# Altium PCB Non-Isolated Gate Driver and Supply.PcbDoc
Units mil, origin at the board's own origin, x right, y up, seen from the top; angles counter-clockwise.
Board outline 3300 x 1325 mil, 2 copper layers (Top Layer, Bottom Layer); 27 components, 32 nets, 90 pads, 12 vias.
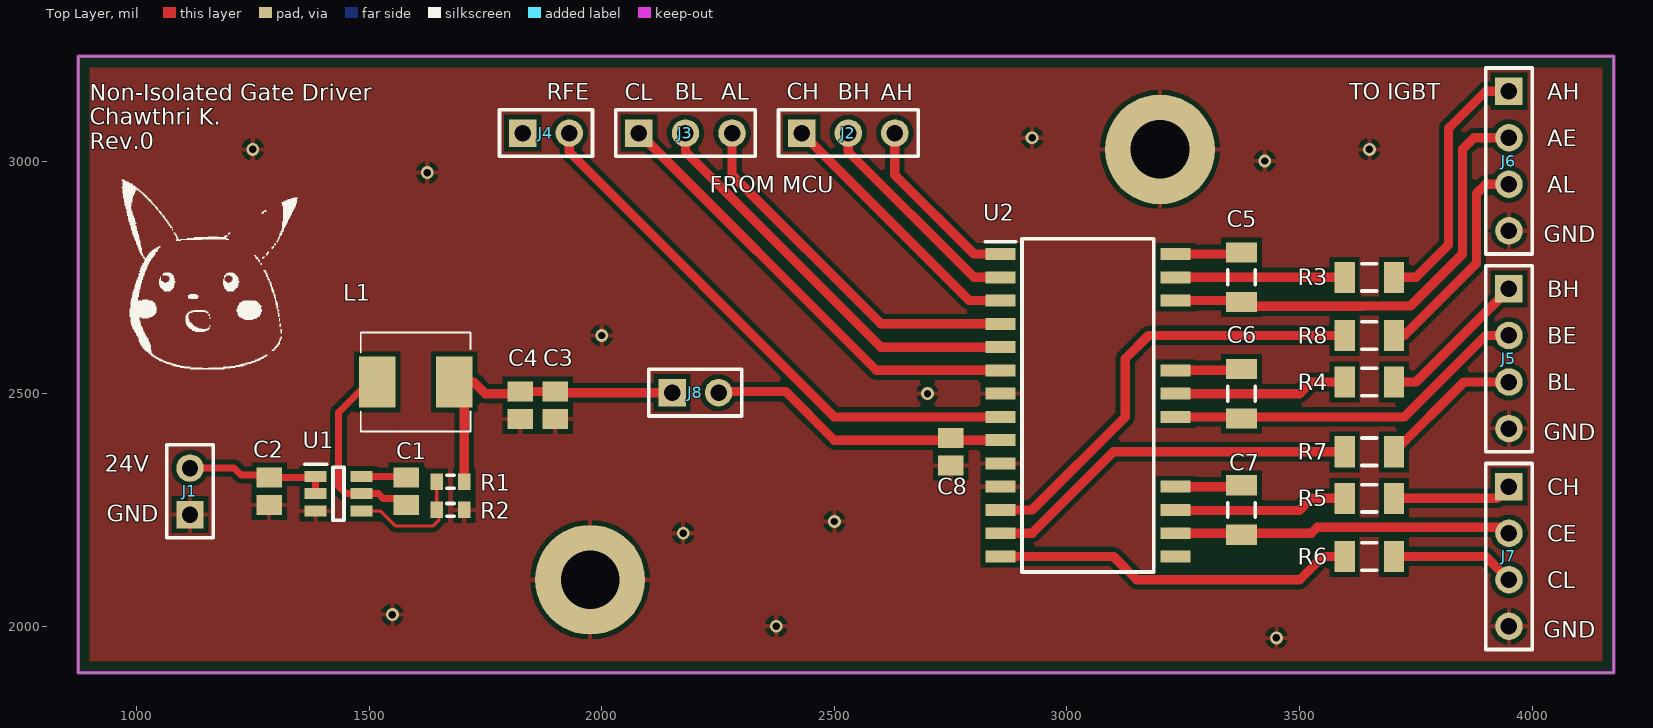
[diagram p0: Top Layer view]
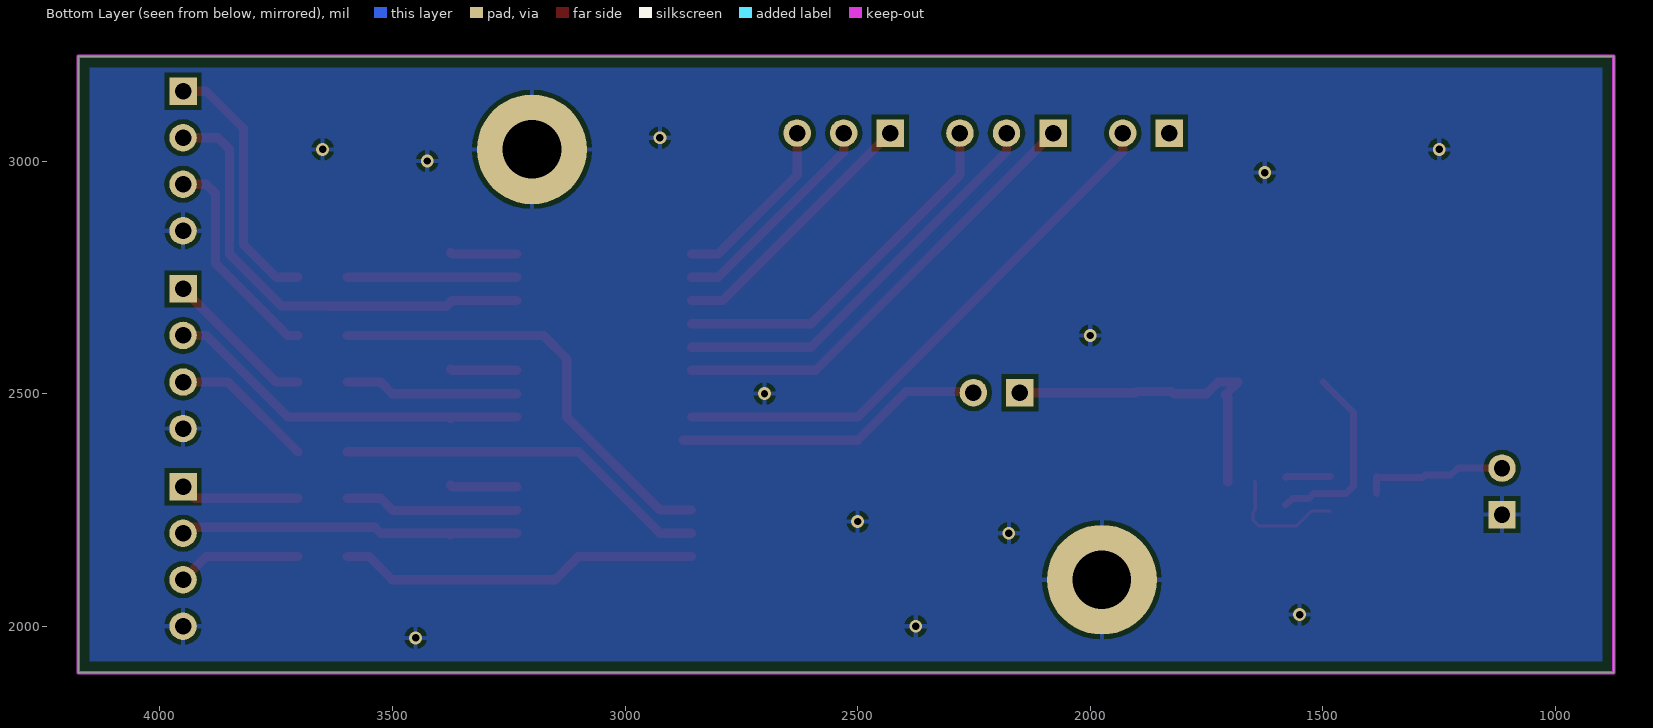
[diagram p1: Bottom Layer view, seen from below]

## Layer stack, top to bottom
Top Solder: solder mask 0.4, Solder Resist, Dk 3.5
Top Layer: signal copper 1.4
Dielectric 1: dielectric 12.6, FR-4, Dk 4.8
Bottom Layer: signal copper 1.4
Bottom Solder: solder mask 0.4, Solder Resist, Dk 3.5

## Board outline
875,1900 4175,1900 4175,3225 875,3225

## Design rules (kind name [scope] priority, off if disabled: settings)
Clearance [All] p1: gap=10 ignorepadtopadclearanceinfootprint=FALSE except(0: Arc-Hole Track-Hole SMDPad-Hole THPad-Hole Via-Hole Fill-Hole Poly-Hole Region-Hole Text-Hole)
MinimumSolderMaskSliver [All] p1: minsoldermaskwidth=5
PolygonConnect [All] p1: connectstyle=Relief reliefconductorwidth=10 reliefentries=4 polygonreliefangle="90 Angle" airgapwidth=10
RoutingVias [All] p1: holewidth=15.75 width=27.56 viastyle="Through Hole" minholewidth=11.81 minwidth=23.62 maxholewidth=236.22 maxwidth=236.22
SilkToSolderMaskClearance [IsPad] p1: minsilkscreentomaskgap=3 clearancetoexposedcopper=TRUE
SolderMaskExpansion [All] p1: expansion=4 istentingtop=FALSE
Width [All] p1: maxlimit=20 minlimit=7 preferedwidth=7 minimp=50.000000 maximp=50.000000 favimp=50.000000
28 further rules are at their usual default settings.

## Components (designator, comment, footprint, x,y, rotation, side; value= is the part's Value field where it differs from the comment)
C1 "Cap" C0805 1580,2290 r270 top value=0.47uF
C2 "Cap" C0805 1285,2290.47 r270 top value=2.2uF
C3 "Cap" C0805 1900,2475 r270 top value=10uF
C4 "Cap" C0805 1825,2475 r270 top value=22uF
C5 "Cap" C1206 3375,2750 r90 top value=0.47uF
C6 "Cap" C1206 3375,2500 r90 top value=0.47uF
C7 "Cap" C1206 3375,2250 r90 top value=0.47uF
C8 "Cap" C0805 2750,2375 r270 top value=1uF
J1 "Header 2" HDR1X2 1115,2240 r90 top
J2 "Header 3" HDR1X3 2430,3060 r0 top
J3 "Header 3" HDR1X3 2080,3060 r0 top
J4 "Header 2" HDR1X2 1830.15,3060 r0 top
J5 "Header 4" HDR1X4 3950,2725 r270 top
J6 "Header 4" HDR1X4 3950,3150 r270 top
J7 "Header 4" HDR1X4 3950,2300 r270 top
J8 "Header 2" HDR1X2 2151.08,2502.08 r0 top
L1 "33uH" PM4340682NLT 1600,2525 r270 top
R1 "Res3" J1-0603 1675,2310.54 r0 top value=75
R2 "Res3" J1-0603 1675,2250 r0 top value=75
R3 "Res3" C1206 3650,2750 r180 top value=75
R4 "Res3" C1206 3650,2525 r180 top value=75
R5 "Res3" C1206 3650,2275 r180 top value=75
R6 "Res3" C1206 3650,2150 r180 top value=75
R7 "Res3" C1206 3650,2375 r180 top value=75
R8 "Res3" C1206 3650,2625 r180 top value=75
U1 "LMR50410" SOT95P280X145-6N 1434.21,2285 r0 top
U2 "6ED2230S12TXUMA1" SOIC127P1030X265-28N 3045,2475 r0 top

## Footprints (in the part's own frame and the unit in brackets; to place one, negate y for a bottom-side part, rotate by r counter-clockwise, add the part's x,y. Pads: shape width x height; smd on the part's side, far side on the other; paste and mask are expansions set on the pad)
C0805 [mm] "Chip Capacitor, Body 2.0x1.3mm, IPC High Density"
  rect 1.1x1.4 smd: 1(-0.75,0) 2(0.75,0)
  body extent -1.1,-0.72 1.1,0.72, height 1.4
C1206 [mm] "Chip Capacitor, Body 3.2x1.6mm, IPC High Density"
  rect 1.1x1.7 smd: 1(-1.35,0) 2(1.35,0)
  silkscreen extent -0.4,-0.75 0.4,0.75, body extent -1.7,-0.9 1.7,0.9, height 1.3
HDR1X2 [mm] "Connector; Header; 2 Position"
  rect 1.5x1.5 hole 0.9: 1(0,0)
  round 1.5 hole 0.9: 2(2.54,0)
  silkscreen extent -1.27,-1.27 3.81,1.27
HDR1X3 [mm] "Connector; Header; 3 Position"
  rect 1.5x1.5 hole 0.9: 1(0,0)
  round 1.5 hole 0.9: 2(2.54,0) 3(5.08,0)
  silkscreen extent -1.27,-1.27 6.35,1.27
HDR1X4 [mm] "Connector; Header; 4 Position"
  rect 1.5x1.5 hole 0.9: 1(0,0)
  round 1.5 hole 0.9: 2(2.54,0) 3(5.08,0) 4(7.62,0)
  silkscreen extent -1.27,-1.27 8.89,1.27
J1-0603 [mm] "Chip Resistor, Body 1.6x0.8mm, IPC High Density"
  rect 0.7x0.9 smd: 1(-0.75,0) 2(0.75,0)
  silkscreen extent -0.2,-0.35 0.2,0.35, body extent -0.85,-0.48 0.85,0.48, height 0.9
PM4340682NLT [mm]
  rect 2.8x2 smd: 1(0,-2.1) 2(0,2.1)
  silkscreen extent -2.7,-3 2.7,3, body extent -2.7,-3 2.7,3, height 2.1
SOIC127P1030X265-28N [mm]
  rect 1.65x0.65 smd: 1(-4.775,8.255) 2(-4.775,6.985) 3(-4.775,5.715) 4(-4.775,4.445) 5(-4.775,3.175) 6(-4.775,1.905) 7(-4.775,0.635) 8(-4.775,-0.635) 9(-4.775,-1.905) 10(-4.775,-3.175) 11(-4.775,-4.445) 12(-4.775,-5.715) 13(-4.775,-6.985) 14(-4.775,-8.255) 15(4.775,-8.255) 16(4.775,-6.985) 17(4.775,-5.715) 18(4.775,-4.445) 21(4.775,-0.635) 22(4.775,0.635) 23(4.775,1.905) 26(4.775,5.715) 27(4.775,6.985) 28(4.775,8.255)
  silkscreen extent -5.6,-9.1 3.6,9.1, body extent -5.15,-9.1 5.15,9.1, height 2.65
SOT95P280X145-6N [mm]
  rect 1.2x0.6 smd: 1(-1.25,0.95) 2(-1.25,0) 3(-1.25,-0.95) 4(1.25,-0.95) 5(1.25,0) 6(1.25,0.95)
  silkscreen extent -1.85,-1.45 0.3,1.6, body extent -1.4,-1.45 1.4,1.45, height 1.45

## Part data
C1 C2 C3 C4 C5 C6 C7 C8: "Capacitor", LatestRevisionDate=17-Jul-2002, LatestRevisionNote="Re-released for DXP Platform.", PackageDescription="Radial Cap, Thru-Hole; 2 Leads; 0.3 in Pin Spacing", PackageReference=RAD-0.3, Published=8-Jun-2000, Publisher="Altium Limited"
J1 J4 J8: "Header, 2-Pin", LatestRevisionDate=17-Jul-2002, LatestRevisionNote="Re-released for DXP Platform.", Publisher="Altium Limited"
J2 J3: "Header, 3-Pin", LatestRevisionDate=17-Jul-2002, LatestRevisionNote="Re-released for DXP Platform.", Publisher="Altium Limited"
J5 J6 J7: "Header, 4-Pin", LatestRevisionDate=17-Jul-2002, LatestRevisionNote="Re-released for DXP Platform.", Publisher="Altium Limited"
L1: library part PM4340.333NLT, "Inductor", Manufacturer_Name=Pulse, Arrow Part Number=PM4340.333NLT, Datasheet Link=https://products.pulseelex.com/files/product_files/P767.pdf, Height=2mm, Manufacturer_Part_Number=PM4340.333NLT
R1 R2 R3 R4 R5 R6 R7 R8: "Resistor", LatestRevisionDate=29-May-2009, LatestRevisionNote="IPC-7351 Footprint Added.", PackageDescription="Chip Resistor", PackageReference=J1-0603, Published=8-Jun-2000, Publisher="Altium Limited"
U1: "Integrated Circuit", Manufacturer_Name="Texas Instruments", Arrow Part Number=LMR50410, Datasheet Link=https://www.ti.com/lit/ds/symlink/lmr50410.pdf?ts=1598511476132&ref_url=https%253A%252F%252Fwww.ti.com%252Fproduct%252FLMR50410, Height=1.45mm, Manufacturer_Part_Number=LMR50410
U2: "Integrated Circuit", Manufacturer_Name=Infineon, Mouser Part Number=726-6ED2230S12TXUMA1, Arrow Part Number=6ED2230S12TXUMA1, Arrow Price/Stock=https://www.arrow.com/en/products/6ed2230s12txuma1/infineon-technologies-ag, Datasheet Link=https://www.arrow.com/en/products/6ed2230s12txuma1/infineon-technologies-ag, Height=2.65mm, Manufacturer_Part_Number=6ED2230S12TXUMA1, Mouser Price/Stock=https://www.mouser.co.uk/ProductDetail/Infineon-Technologies/6ED2230S12TXUMA1?qs=%252BEew9%252B0nqrDqONJq1%252BaRWQ%3D%3D

## Free pads (board coordinates)
  round 236.22 hole 125.98: 3(3200,3025) 4(1975,2100)

## Via types
v1: diameter 27.56, hole 15.75, Top Layer to Bottom Layer, 12 vias

## Nets (pads, with @x,y where several pads share a name; then routed paths per layer and width w, separated by ;. In a path a pad name is that pad's centre, name@x,y a point inside that pad or via, vN(x,y) a via of type N, cw(c..) or ccw(c..) an arc to the next point about the centre after c; other vN are vias at no path point)
15V: C8.1 J8.2 U2.9 | length 643.3
  Top Layer w20: J8.2@2275,2504.53 2395.47,2504.53 2500,2400 U2.9 U2.9@2875,2400
24V: C2.1 J1.2 U1.1 U1.2 | length 316.7
  Top Layer w15: J1.2 1210,2340 1225,2325 1280,2325 C2.1 1382.6,2320 U1.1 U1.2
A_BOOT: C5.1 J6.2 U2.26 | length 1003.7
  Top Layer w20: U2.26 3371.85,2700 C5.1 3383.79,2688.06 3632.96,2688.06 3633.28,2688.37 3738.37,2688.37 3850,2800 3850,3025 3875,3050 J6.2
A_BOT: J6.3 R8.1 | length 469.3
  Top Layer w20: R8.1 3725,2625 3880,2780 3880,2930 3900,2950 J6.3
A_TOP: J6.1 R3.1 | length 559
  Top Layer w20: R3.1 3750,2750 3820,2820 3820,3070 3823.93,3073.93 3900,3150 J6.1
B_BOOT: C6.1 J5.2 U2.21 | length 767.1
  Top Layer w20: U2.21 3371.85,2450 C6.1 3378.15,2450 3725,2450 3900,2625 J5.2@3925,2625
B_BOT: J5.3 R7.1 | length 309
  Top Layer w20: R7.1 3853.15,2525 J5.3
B_TOP: J5.1 R4.1 | length 329.7
  Top Layer w20: R4.1 3750,2525 J5.1
C_BOOT: C7.1 J7.2 U2.16 | length 730.1
  Top Layer w20: U2.16 3371.85,2200 C7.1 3378.15,2200 3525,2200 3537.62,2212.62 3937.38,2212.62 J7.2
C_BOT: J7.3 R6.1 | length 267.6
  Top Layer w20: R6.1 3900,2150 J7.3
C_TOP: J7.1 R5.1 | length 257.2
  Top Layer w20: R5.1 3925,2275 J7.1
GND: C2.2 C3.2 C4.2 C8.2 J1.1 J5.4 J6.4 J7.4 pad.3 pad.4 R2.2 U1.3 U2.7 U2.10 U2.11
  other v1: 3450,1975 2375,2000 1550,2025 2175,2200 2500,2225 2700,2500 2000,2625 1625,2975 3425,3000 1250,3025 3650,3025 2925,3050
NetC1_1: C1.1 U1.6 | length 97.8
  Top Layer w15: U1.6 1577.13,2322.4 C1.1
NetC1_2: C1.2 L1.1 U1.5 | length 413.7
  Top Layer w15: L1.1@1500,2525 1434.33,2459.33 1434.33,2300.89 1450.22,2285 U1.5 1520.29,2285 1530.29,2275 1565.47,2275 C1.2
NetC3_1: C3.1 C4.1 J8.1 L1.2 R1.2 | length 709.7
  Top Layer w20: R1.2 1704.53,2492.21 1710,2497.68 L1.2 1725,2525 1750,2500 1820.47,2500 C4.1 C3.1 1902.45,2502.08 J8.1
NetC5_2: C5.2 U2.28 | length 143.3
  Top Layer w20: U2.28 3371.85,2800 C5.2
NetC6_2: C6.2 U2.23 | length 143.3
  Top Layer w20: U2.23 3371.85,2550 C6.2
NetC7_2: C7.2 U2.18 | length 143.3
  Top Layer w20: U2.18 3371.85,2300 C7.2
NetR1_1: R1.1 R2.1 U1.4 | length 269.2
  Top Layer w7: U1.4 1524.57,2247.6 1556.48,2215.69 1637.55,2215.69 1650,2228.13 1650,2245.47 R2.1 R1.1
NetR3_2: R3.2 U2.27 | length 363.9
  Top Layer w20: U2.27 R3.2
NetR4_2: R4.2 U2.22 | length 374.2
  Top Layer w20: U2.22 3500,2500 3525,2525 R4.2
NetR5_2: R5.2 U2.17 | length 375.1
  Top Layer w20: U2.17 3234.03,2248.96 3498.96,2248.96 3524.99,2275 3550,2275 R5.2
NetR6_2: R6.2 U2.14 | length 781.3
  Top Layer w20: U2.14 3100,2150 3150,2100 3500,2100 3550,2150 R6.2
NetR7_2: R7.2 U2.13 | length 812.3
  Top Layer w20: U2.13 2925,2200 3100,2375 R7.2
NetR8_2: R8.2 U2.12 | length 968.4
  Top Layer w20: U2.12 2925,2250 3125,2450 3125,2575 3175,2625 R8.2
PWM_A_BOT: J3.3 U2.4 | length 799.6
  Top Layer w20: J3.3 2280,2970 2600,2650 U2.4
PWM_A_TOP: J2.3 U2.1 | length 387.4
  Top Layer w20: J2.3 2630,2970 2800,2800 U2.1
PWM_B_BOT: J3.2 U2.5 | length 891
  Top Layer w20: J3.2 2180,3020 2600,2600 U2.5
PWM_B_TOP: J2.2 U2.2 | length 478.8
  Top Layer w20: J2.2 2530,3020 2800,2750 U2.2
PWM_C_BOT: J3.1 U2.6 | length 988.3
  Top Layer w20: J3.1 2590,2550 U2.6
PWM_C_TOP: J2.1 U2.3 | length 576.1
  Top Layer w20: J2.1 2790,2700 U2.3
RFE: J4.2 U2.8 | length 1203
  Top Layer w20: J4.2 1930.15,3019.85 2500,2450 U2.8
pads on no net: J4.1 U2.15

## Polygon pours and split planes (outlines as drawn)
GND on Bottom Layer "GND_L02_P000" (solid, remove dead copper, pour order 0): 900,3200 4150,3200 4150,1925 900,1925
GND on Top Layer "GND_L01_P002" (solid, remove dead copper, pour order 2): 900,3200 4150,3200 4150,1925 900,1925

## Keep-outs
Keep-Out Layer:
  the board outline again, w7

## Silkscreen, mask and mechanical layers (free items; w line width, h text height)
Top Overlay:
  drawing of 39 lines, arcs and shapes, not listed
  text "RFE" at 1882,3132 h35
  text "BL" at 2157,3132 h35
  text "AL" at 2257,3132 h35
  text "CH" at 2397.47,3131.91 h35
  text "BH" at 2507,3132 h35
  text "TO IGBT" at 3607,3132 h35
  text "AH" at 4032,3132 h35
  text "CL" at 2049.5,3130.38 h35
  text "AH" at 2599.82,3130.38 h35
  text "AE" at 4032,3032 h35
  text "Non-Isolated Gate Driver / Chawthri K. / Rev.0" at 900,3025 h35
  text "FROM MCU" at 2232,2932 h35
  text "AL" at 4032,2932 h35
  text "GND" at 4025,2825 h35
  text "BH" at 4032,2707 h35
  text "BE" at 4032,2607 h35
  text "BL" at 4032,2507 h35
  text "GND" at 4025,2400 h35
  text "24V" at 932,2332 h35
  text "CH" at 4032,2282 h35
  text "GND" at 936.58,2224.41 h35
  text "CE" at 4032,2182 h35
  text "CL" at 4032,2082 h35
  text "GND" at 4025,1975 h35